# Altium PCB FuncGen.PcbDoc
Units mil, origin at the board's own origin, x right, y up, seen from the top; angles counter-clockwise.
Board outline 2500 x 1300 mil, 4 copper layers (Top Layer, Signal Layer 1, Signal Layer 2, Bottom Layer), stack 30.634 mil thick; 77 components, 50 nets, 267 pads, 75 vias.
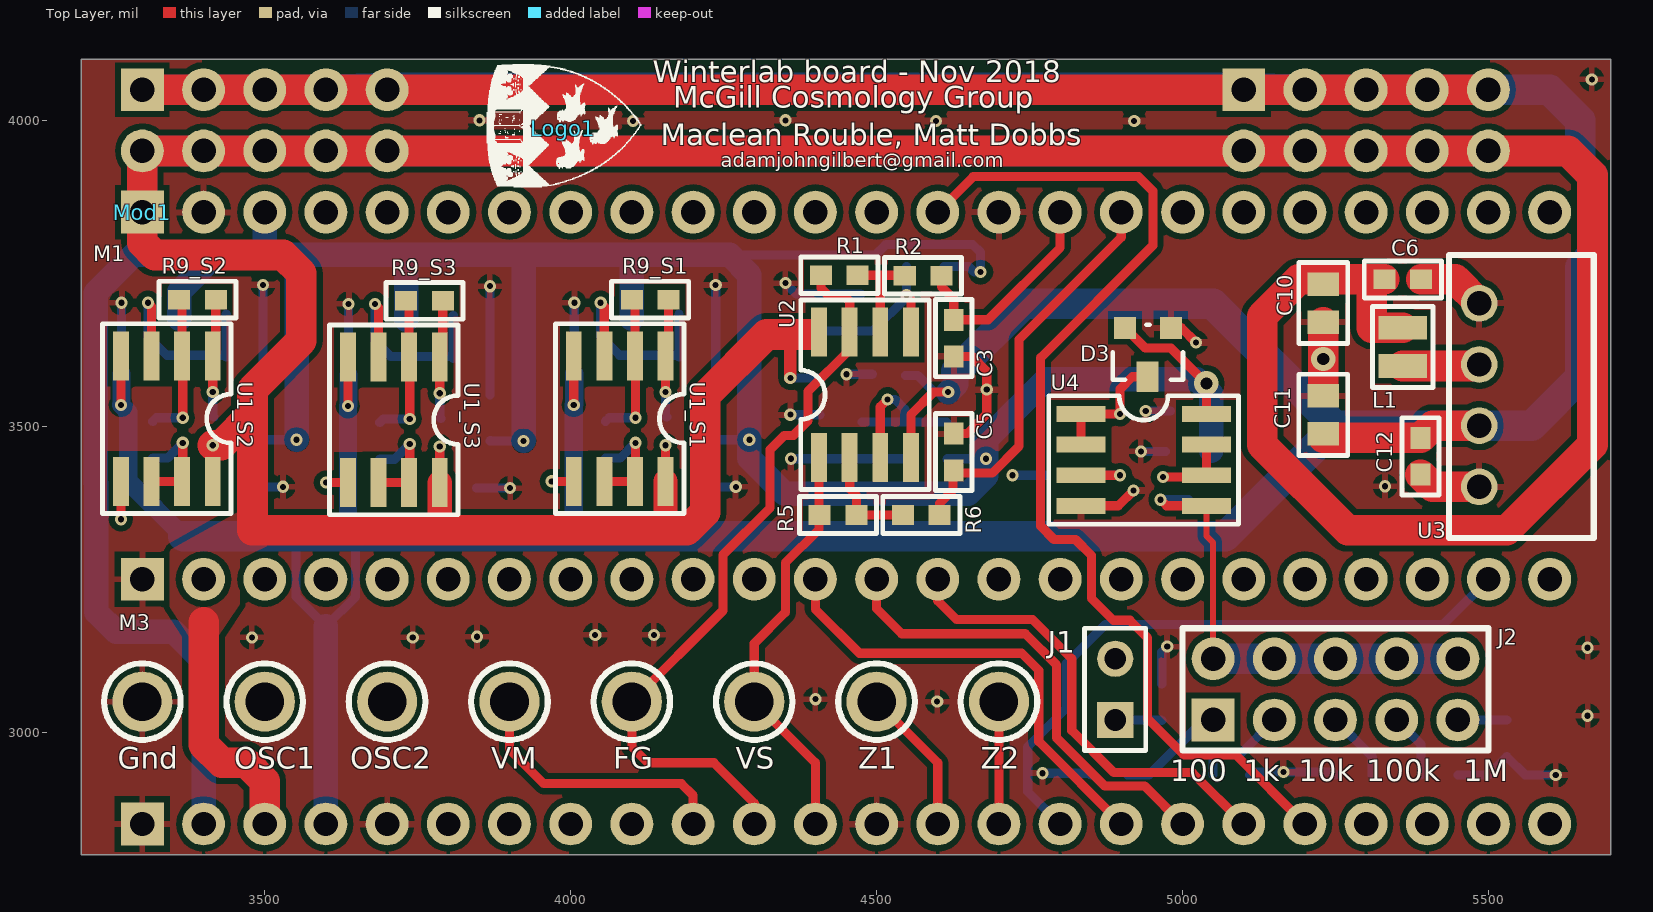
[diagram p0: Top Layer view]
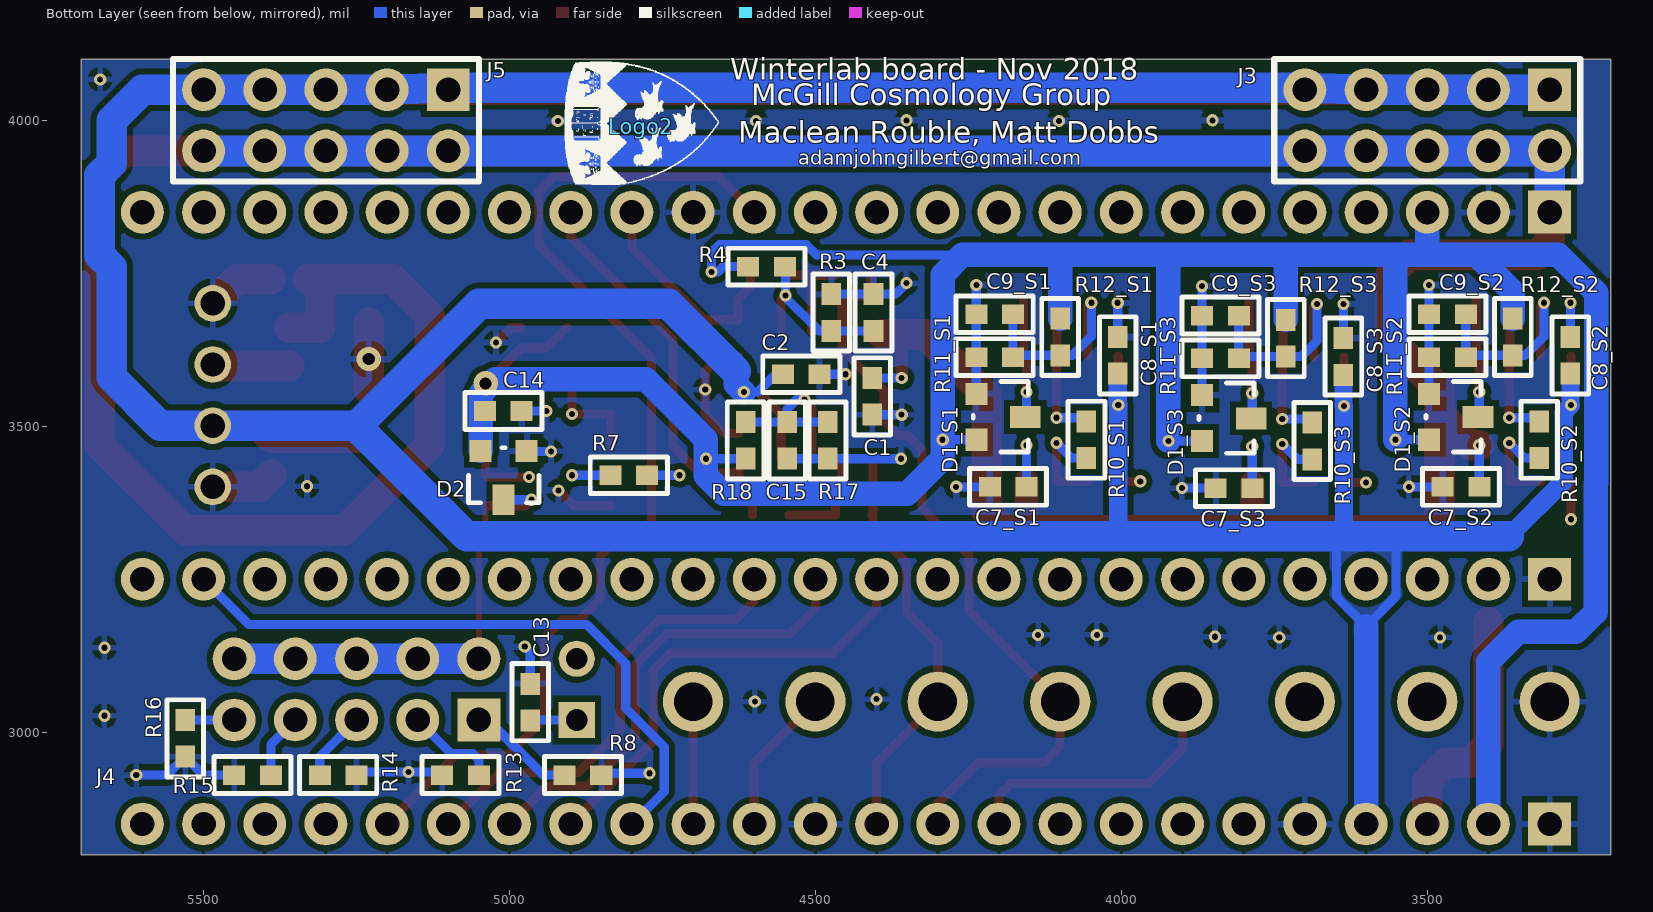
[diagram p1: Bottom Layer view, seen from below]
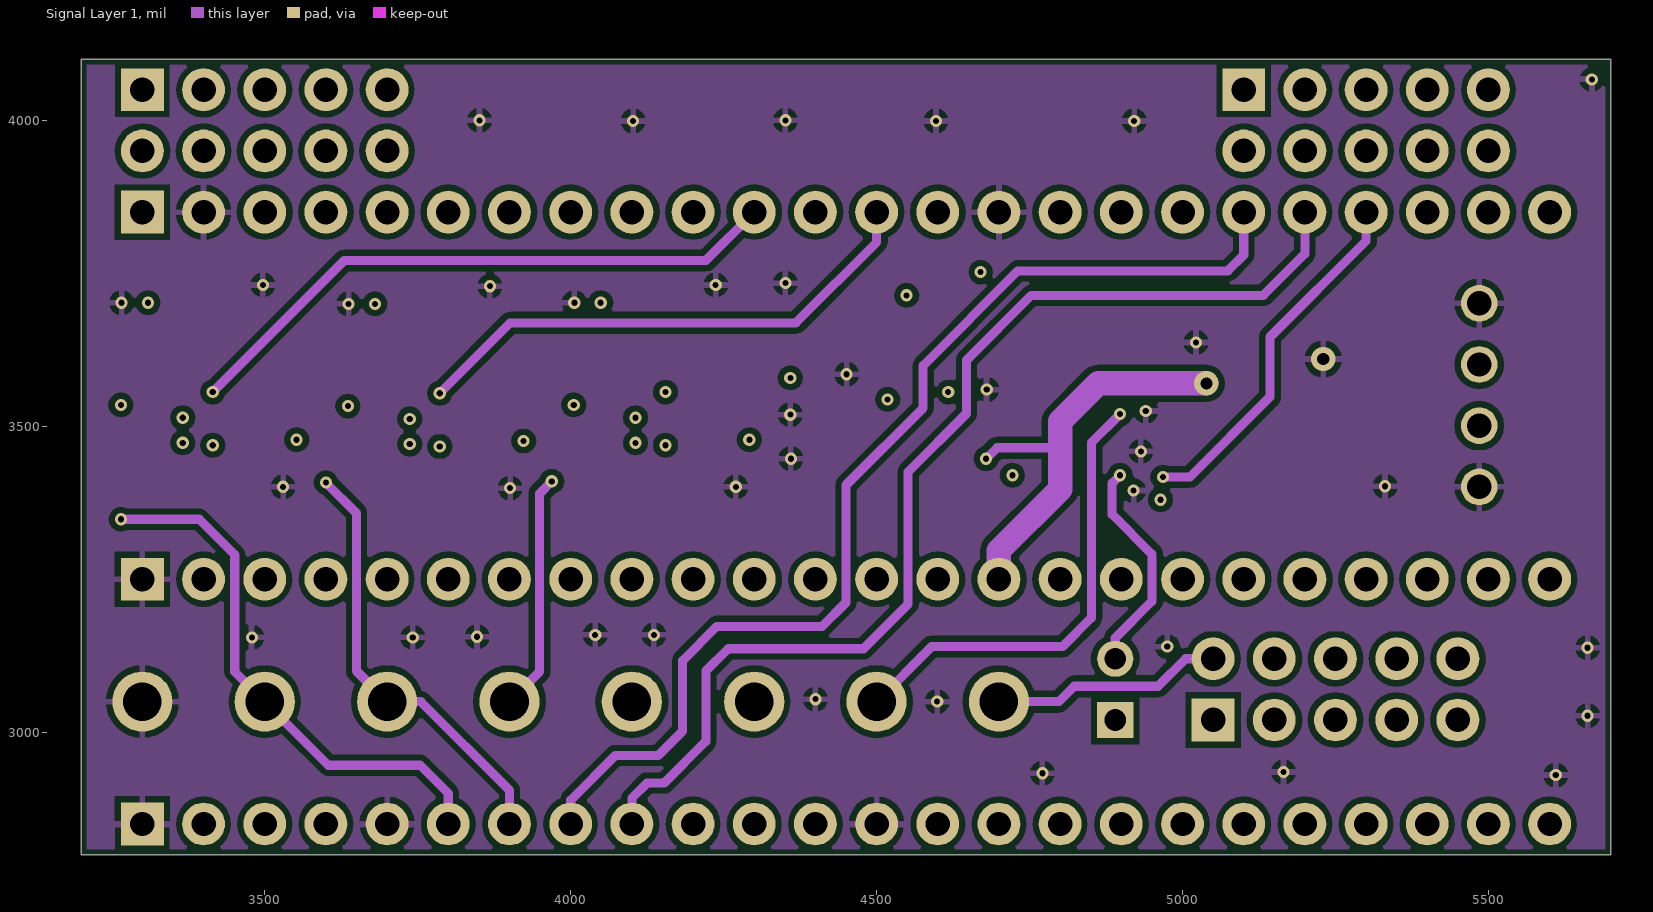
[diagram p2: Signal Layer 1]
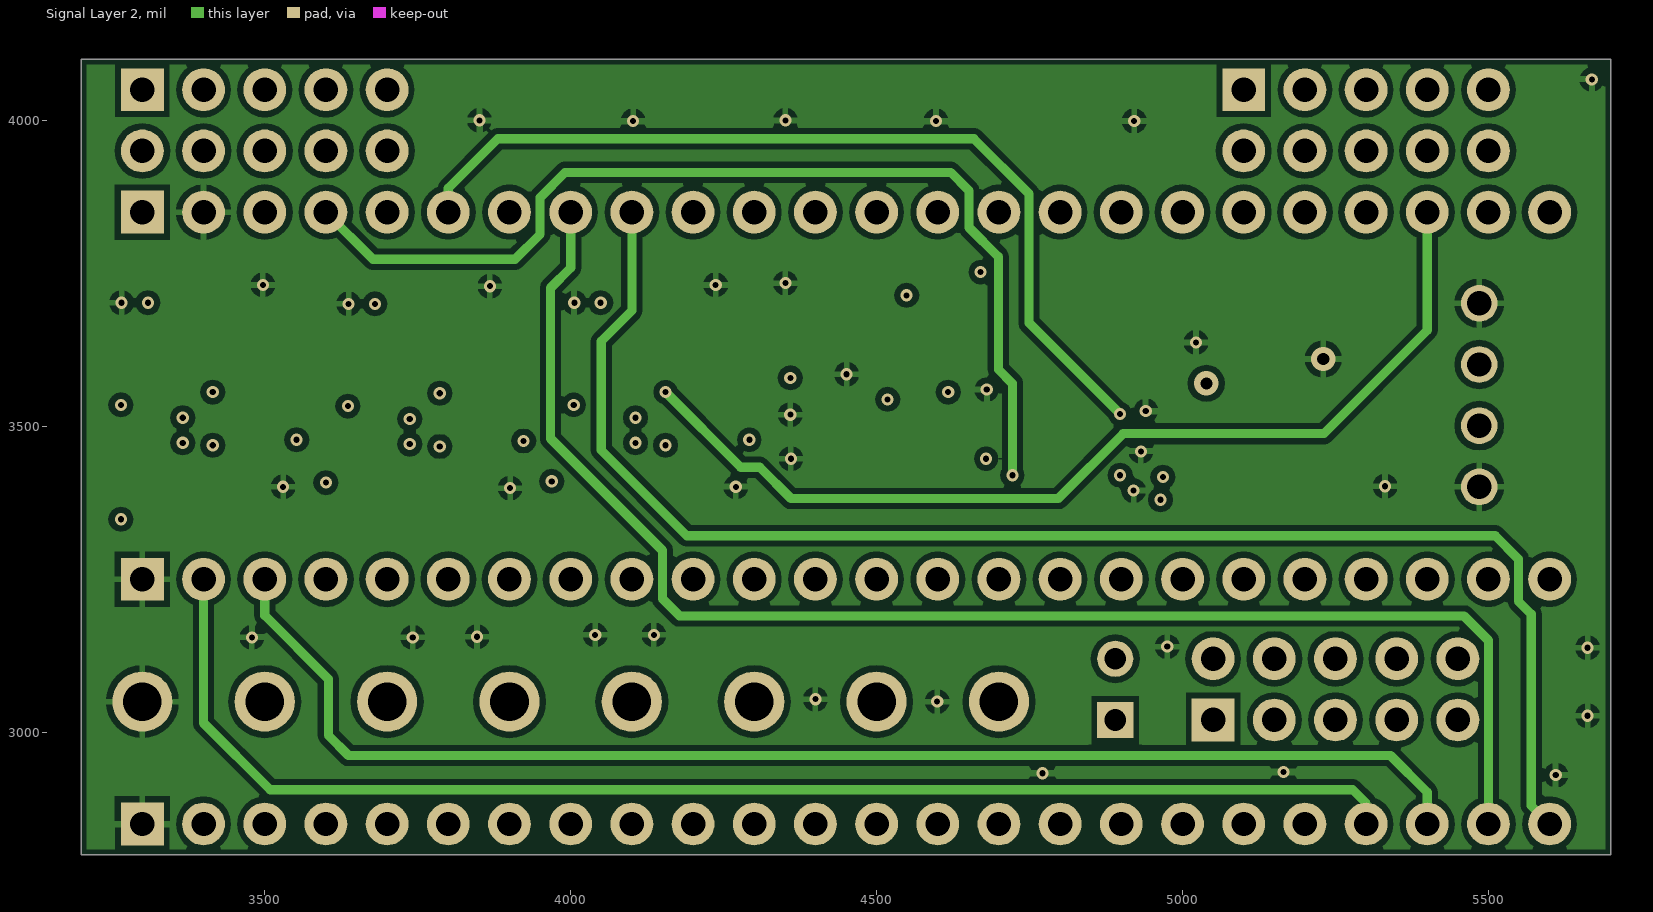
[diagram p3: Signal Layer 2]

## Layer stack, top to bottom
Top Solder: solder mask 0.4, Solder Resist, Dk 3.5
Top Layer: signal copper 1.4
Dielectric 1: core 10, FR-4, Dk 4.2
Signal Layer 1: signal copper 1.417
Dielectric 3: prepreg 5, Dk 4.2
Signal Layer 2: signal copper 1.417
Dielectric 2: core 10, Dk 4.2
Bottom Layer: signal copper 1.4
Bottom Solder: solder mask 0.4, Solder Resist, Dk 3.5

## Board outline
3200,2800 3200,4100 5700,4100 5700,2800

## Design rules (kind name [scope] priority, off if disabled: settings)
Clearance [All] p1: gap=6 ignorepadtopadclearanceinfootprint=FALSE except(0: Arc-Hole Track-Hole SMDPad-Hole THPad-Hole Via-Hole Fill-Hole Poly-Hole Region-Hole Text-Hole; 10: Arc-Fill Arc-Poly Arc-Region Track-Fill Track-Poly Track-Region SMDPad-Fill SMDPad-Poly SMDPad-Region THPad-Fill THPad-Poly THPad-Region Via-Fill Via-Poly Via-Region Fill-Fill Fill-Poly Fill-Region Poly-Poly Poly-Region Region-Region)
MinimumSolderMaskSliver [All] p1: minsoldermaskwidth=5
PolygonConnect [All] p1: connectstyle=Relief reliefconductorwidth=10 reliefentries=4 polygonreliefangle="90 Angle" airgapwidth=10
RoomDefinition S4 [InComponentClass('S4')] p1: confinementstyle=ConfineIn formatcopy=TRUE lockcomponents=FALSE outline 4360,3311 4670,3311 4670,3805 4360,3805
RoomDefinition S3 [InComponentClass('S3')] p2: confinementstyle=ConfineIn formatcopy=TRUE lockcomponents=FALSE outline 3949,3749 3592,3749 3592,3341 3949,3341
RoomDefinition S2 [InComponentClass('S2')] p3: confinementstyle=ConfineIn formatcopy=TRUE lockcomponents=FALSE outline 3578,3751 3221,3751 3221,3343 3578,3343
RoomDefinition S1 [InComponentClass('S1')] p4: confinementstyle=ConfineIn formatcopy=TRUE lockcomponents=FALSE outline 4318,3751 3961,3751 3961,3343 4318,3343
RoomDefinition ME1 [InComponentClass('ME1')] p5: confinementstyle=ConfineIn formatcopy=TRUE lockcomponents=FALSE outline 4728,2886 5574,2886 5574,3693 4728,3693
RoutingVias [All] p1: holewidth=10 width=20 viastyle="Through Hole" minholewidth=10 minwidth=20 maxholewidth=100 maxwidth=100
SilkToSilkClearance [All] p1: silktosilkclearance=0
SilkToSolderMaskClearance [IsPad] p1: minsilkscreentomaskgap=5 clearancetoexposedcopper=TRUE
SolderMaskExpansion [All] p1: expansion=4
Width [All] p1: maxlimit=200 minlimit=7 preferedwidth=15
27 further rules are at their usual default settings.

## Classes and differential pairs
component class TopLevel: C6 C10 C11 C12 FG Gnd J3 J4 J5 L1 Logo1 Logo2 M1 M3 Mod1 OSC1 OSC2 U3 VM VS Z1 Z2
component class ME1: C13 C14 D2 D3 J1 J2 R7 R8 R13 R14 R15 R16 U4
component class S1: C7_S1 C8_S1 C9_S1 D1_S1 R9_S1 R10_S1 R11_S1 R12_S1 U1_S1
component class S2: C7_S2 C8_S2 C9_S2 D1_S2 R9_S2 R10_S2 R11_S2 R12_S2 U1_S2
component class S3: C7_S3 C8_S3 C9_S3 D1_S3 R9_S3 R10_S3 R11_S3 R12_S3 U1_S3
component class S4: C1 C2 C3 C4 C5 C15 R1 R2 R3 R4 R5 R6 R17 R18 U2
channel class LevelShiftADC: S1 S2 S3

## Components (designator, comment, footprint, x,y, rotation, side; value= is the part's Value field where it differs from the comment)
C1 "0.1uF" 0603 4407,3519 r90 bottom
C2 "0.1uF" 0603 4553,3585 r180 bottom
C3 "47pF" 0603 4626,3614 r90 top
C4 "0.1uF" 0603 4405,3716 r270 bottom
C5 "47pF" 0603 4626,3488 r270 top
C6 "330pF" 0603 5330,3740 r0 top
C7_S1 "0.1uF" 0603 4215,3401 r180 bottom (schematic designator C7)
C7_S2 "0.1uF" 0603 3475,3401 r180 bottom (schematic designator C7)
C7_S3 "0.1uF" 0603 3846,3399 r180 bottom (schematic designator C7)
C8_S1 "0.1uF" 0603 4006,3586 r90 bottom (schematic designator C8)
C8_S2 "0.1uF" 0603 3266,3586 r90 bottom (schematic designator C8)
C8_S3 "0.1uF" 0603 3637,3584 r90 bottom (schematic designator C8)
C9_S1 "0.1uF" 0603 4237,3683 r180 bottom (schematic designator C9)
C9_S2 "0.1uF" 0603 3497,3683 r180 bottom (schematic designator C9)
C9_S3 "0.1uF" 0603 3868,3681 r180 bottom (schematic designator C9)
C10 "10uF" 0805 5230,3670 r90 top
C11 "10uF" 0805 5230,3487.5 r90 top
C12 "330pF" 0603 5389,3421 r90 top
C13 "0.1uF" 0603 4966,3079 r270 bottom
C14 "0.1uF" 0603 4980,3525 r0 bottom
C15 "0.1uF" 0603 4546,3447 r90 bottom
D1_S1 "SDM40E20LS-7-F" SOT23 4157,3515 r270 bottom (schematic designator D1)
D1_S2 "SDM40E20LS-7-F" SOT23 3417,3515 r270 bottom (schematic designator D1)
D1_S3 "SDM40E20LS-7-F" SOT23 3788,3513 r270 bottom (schematic designator D1)
D2 "SDM40E20LS-7-F" SOT23 5010,3380 r0 bottom
D3 "SDM40E20LS-7-F" SOT23 4943,3581 r180 top
FG "Test Point" TESTPOINT 4100,3050 r0 top
Gnd "Long Green Test Point" TESTPOINT 3300,3050 r0 top
J1 "Header 2pin 0.1\"" HDR1X2 4890,3020 r90 top
J2 "Header 2 x 5pin 0.1\"" Header2x5 5050,3020 r0 top
J3 "Header 2 x 5pin 0.1\"" Header2x5 3300,4050 r0 bottom
J4 "24 Pin Header" HEADER24MALE 3300,2850 r0 bottom
J5 "Header 2 x 5pin 0.1\"" Header2x5 5100,4050 r0 bottom
L1 "22uH" 0806 5360,3661 r270 top
Logo1 "McGillLogo" McGillLogo1 3988,3986 r90 top
Logo2 "McGillLogo" McGillLogo1 4785,3990 r90 bottom
M1 "Teensy 3.6 SideB" HEADER24FEMALE 3300,3850 r0 top
M3 "Teensy 3.6 SideA" HEADER24FEMALE 3300,3250 r0 top locked
Mod1 "Teensy 3.6 3D model" TEENSY3DMODEL 3300,3850 r270 top locked
OSC1 "Test Point" TESTPOINT 3500,3050 r0 top
OSC2 "Test Point" TESTPOINT 3700,3050 r180 top
R1 "Res0603" 0603 4469,3747 r180 top value=10k
R2 "Res0603" 0603 4606,3746 r180 top value=3.32k
R3 "Res0603" 0603 4474,3716 r270 bottom value=4k
R4 "Res0603" 0603 4550,3761 r0 bottom value=6.65k
R5 "Res0603" 0603 4467,3355 r180 top value=10k
R6 "Res0603" 0603 4603,3355 r180 top value=3.32k
R7 "Res0603" 0603 4835,3420 r180 bottom value=1k
R8 "Res0603" 0603 4850,2930 r0 bottom value=100
R9_S1 "Res0603" 0603 4100,3707 r0 top value=3.32k (schematic designator R9)
R9_S2 "Res0603" 0603 3360,3707 r0 top value=3.32k (schematic designator R9)
R9_S3 "Res0603" 0603 3731,3705 r0 top value=3.32k (schematic designator R9)
R10_S1 "Res0603" 0603 4057,3448 r90 bottom value=10k (schematic designator R10)
R10_S2 "Res0603" 0603 3317,3448 r90 bottom value=10k (schematic designator R10)
R10_S3 "Res0603" 0603 3688,3446 r90 bottom value=10k (schematic designator R10)
R11_S1 "Res0603" 0603 4237,3613 r180 bottom value=4k (schematic designator R11)
R11_S2 "Res0603" 0603 3497,3613 r180 bottom value=4k (schematic designator R11)
R11_S3 "Res0603" 0603 3868,3611 r180 bottom value=4k (schematic designator R11)
R12_S1 "Res0603" 0603 4100,3616 r90 bottom value=6.7k (schematic designator R12)
R12_S2 "Res0603" 0603 3360,3616 r90 bottom value=6.7k (schematic designator R12)
R12_S3 "Res0603" 0603 3731,3614 r90 bottom value=6.7k (schematic designator R12)
R13 "Res0603" 0603 5110,2930 r180 bottom value=1k
R14 "Res0603" 0603 5250,2930 r0 bottom value=10k
R15 "Res0603" 0603 5450,2930 r180 bottom value=100k
R16 "Res0603" 0603 5530,2960 r90 bottom value=1M
R17 "Res0603" 0603 4480,3447 r90 bottom value=4k
R18 "Res0603" 0603 4614,3507 r270 bottom value=6.65k
U1_S1 "LT6231CS8#PBF" SO8 4155,3615 r270 top (schematic designator U1)
U1_S2 "LT6231CS8#PBF" SO8 3415,3615 r270 top (schematic designator U1)
U1_S3 "LT6231CS8#PBF" SO8 3786,3613 r270 top (schematic designator U1)
U2 "LT6231CS8#PBF" SO8 4406,3449 r90 top
U3 "RFM-0505S" RFM-0505S 5485,3701 r270 top
U4 "LT1801CS8" SO8 4834,3520 r0 top
VM "Test Point" TESTPOINT 3900,3050 r0 top
VS "Test Point" TESTPOINT 4300,3050 r0 top
Z1 "Test Point" TESTPOINT 4500,3050 r0 top
Z2 "Test Point" TESTPOINT 4700,3050 r0 top

## Footprints (in the part's own frame and the unit in brackets; to place one, negate y for a bottom-side part, rotate by r counter-clockwise, add the part's x,y. Pads: shape width x height; smd on the part's side, far side on the other; paste and mask are expansions set on the pad)
0603 [mil]
  rect 36x32 smd: 1(0,0) 2(60,0)
  silkscreen extent -33,-30 93,30
0805 [mil]
  rect 38.5x52 smd: 1(0,0) 2(62.5,0)
  silkscreen extent -35,-40 98,40
0806 [mil]
  rect 38.5x78.74 smd: 1(0,0) 2(62.5,0)
  silkscreen extent -35,-49 98,49
HDR1X2 [mm] "Connector; Header; 2 Position"
  rect 1.5x1.5 hole 0.9: 1(0,0)
  round 1.5 hole 0.9: 2(2.54,0)
  silkscreen extent -1.27,-1.27 3.81,1.27
Header2x5 [mil]
  rect 70x70 hole 40: 1(0,0)
  round 70 hole 40: 2(0,100) 3(100,0) 4(100,100) 5(200,0) 6(200,100) 7(300,0) 8(300,100) 9(400,0) 10(400,100)
  silkscreen extent -50,-50 450,150, body extent -46,-54 454,146, height 336
HEADER24FEMALE [mil] "Header24Female"
  rect 70x70 hole 40: 1(0,0)
  round 70 hole 40: 2(100,0) 3(200,0) 4(300,0) 5(400,0) 6(500,0) 7(600,0) 8(700,0) 9(800,0) 10(900,0) 11(1000,0) 12(1100,0) 13(1200,0) 14(1300,0) 15(1400,0) 16(1500,0) 17(1600,0) 18(1700,0) 19(1800,0) 20(1900,0) 21(2000,0) 22(2100,0) 23(2200,0) 24(2300,0)
  body extent -60,-50 2360,50, height 335
HEADER24MALE [mil] "Header24Male"
  rect 70x70 hole 40: 1(0,0)
  round 70 hole 40: 2(100,0) 3(200,0) 4(300,0) 5(400,0) 6(500,0) 7(600,0) 8(700,0) 9(800,0) 10(900,0) 11(1000,0) 12(1100,0) 13(1200,0) 14(1300,0) 15(1400,0) 16(1500,0) 17(1600,0) 18(1700,0) 19(1800,0) 20(1900,0) 21(2000,0) 22(2100,0) 23(2200,0) 24(2300,0)
  body extent -50,-50 2350,50, height 336
McGillLogo1 [mil] "McGillLogo"
  silkscreen extent -95,-127 106,124
RFM-0505S [mil]
  round 60 hole 40: 1(0,0) 2(100,0) 3(200,0) 4(300,0)
  silkscreen extent -79,-49 384,187, body extent -78,-49 383,186, height 394
SO8 [mil]
  rect 80x26 smd: 1(0,0) 2(0,-50) 3(0,-100) 4(0,-150) 5(205,-150) 6(205,-100) 7(205,-50) 8(205,0)
  silkscreen extent -53,-180 258,30
SOT23 [mil]
  rect 36x36 smd: 1(-38,-80) 2(37,-80)
  rect 36x50 smd: 3(0,0)
  silkscreen extent -58,-85 57,5
TEENSY3DMODEL [mil]
  body extent -52,-105 648,2350, height 616
TESTPOINT [mm] "Test Point with Loop - 1.6mm hole"
  round 2.5 hole 1.6: 0(0,0)
  silkscreen extent -1.59,-1.59 1.59,1.59, body extent -1.6,-1.59 1.57,1.58, height 8.13

## Part data
C1 C2 C3 C4 C5 C6 C7_S1 C7_S2 C7_S3 C8_S1 C8_S2 C8_S3 C9_S1 C9_S2 C9_S3 C12 C13 C14 C15: library part Cap0603, "Capacitor, Ceramic, 0603"
C10 C11: library part Cap0805, "0805", Manufacturer="Samsung Electro-Mechanics", Manufacturers Part Number=CL21A106KPFNNNG, Supplier Part Number 1=1276-6456-1-ND, Supplier 1=Digi-Key, SupplierUnitCost=$0.068
D1_S1 D1_S2 D1_S3 D2 D3: library part DiodeClamp
FG: library part TestPoint, Manufacturer="Keystone Electronics", Manufacturers Part Number="Red - 5005", Supplier Part Number 1=36-5005-ND, Assembly Comments=none, Loaded=True, Param=Red, Part constraints=5005, Supplier 1=Digi-Key, SupplierUnitCost=$0.15
Gnd: library part TestPoint, "Test Point", Manufacturer="Keystone Electronics", Manufacturers Part Number="Green - 5126", Supplier Part Number 1=36-5126-ND, Assembly Comments=none, Loaded=True, Param=Green, Part constraints=5126, Supplier 1=Digi-Key, SupplierUnitCost=$0.15
J1: library part Header2, "Header, 0.1\", 2-Pin straight (Any equivalent - may need to be value added)", Manufacturer=Digikey
J2 J3 J5: library part Header2x5, "Header, 0.1\", 2 row 5 pins", Manufacturer=Digikey
J4: Manufacturer="Wurth Electronics Inc.", Manufacturers Part Number=61302411121, Supplier Part Number 1=732-5331-ND, Loaded=True, Part constraints=61302411121, Supplier 1=Digi-Key, SupplierUnitCost=$0.92
L1: library part CBC2016T220M, "0805", Supplier Part Number 1=587-1609-1-ND, Manufacturers Part Number=CBC2016T220M, Supplier 1=Digikey, SupplierUnitCost=$0.23
Logo1 Logo2: library part Logo
M1: "Teensy 3.6 SideA"
OSC1 OSC2: library part TestPoint, Manufacturer="Keystone Electronics", Manufacturers Part Number="Purple - 5124", Supplier Part Number 1=36-5124-ND, Assembly Comments=none, Loaded=True, Param=Purple, Part constraints=5124, Supplier 1=Digi-Key, SupplierUnitCost=$0.15
R1 R2 R3 R4 R5 R6 R7 R8 R9_S1 R9_S2 R9_S3 R10_S1 R10_S2 R10_S3 R11_S1 R11_S2 R11_S3 R12_S1 R12_S2 R12_S3 R13 R14 R15 R16 R17 R18: "Resistor"
U1_S1 U1_S2 U1_S3 U2: library part TSH82IYDT, "Dual R-R Opamp Soic 8 215Mhz GBP", Manufacturer="Linear Technology/Analog Devices", Supplier Part Number 1=LT6231CS8#PBF-ND, Assembly Comments=none, Loaded=True, Manufacturers Part Number=LT6231CS8#PBF, Part constraints=LT6231CS8#PBF, Supplier 1=Digi-Key, SupplierUnitCost=$3.46
U3: "5V->5V DC-DC converter", Manufacturer="Recom Power", Supplier Part Number 1=945-3159-ND, Loaded=True, Manufacturers Part Number=RFM-0505S, Supplier 1=Digi-Key, SupplierUnitCost=$1.24
U4: library part TSH82IYDT, "Dual R-R Opamp Soic 8 70Mhz GBP", Manufacturer="Linear Technology/Analog Devices", Assembly Comments=none, Loaded=True, Manufacturers Part Number=LT1801CS8, Part constraints=LT1801CS8, Supplier 1=Digi-Key, Supplier Part Number 1=LT1801CS8, SupplierUnitCost=$3.27
VM: library part TestPoint, Manufacturer="Keystone Electronics", Manufacturers Part Number="Yellow - 5009", Supplier Part Number 1=36-5009-ND, Assembly Comments=none, Loaded=True, Param=Yellow, Part constraints=5009, Supplier 1=Digi-Key, SupplierUnitCost=$0.15
VS: library part TestPoint, Manufacturer="Keystone Electronics", Manufacturers Part Number="Orange - 5008", Supplier Part Number 1=36-5008-ND, Assembly Comments=none, Loaded=True, Param=Orange, Part constraints=5008, Supplier 1=Digi-Key, SupplierUnitCost=$0.15
Z1 Z2: library part TestPoint, Manufacturer="Keystone Electronics", Manufacturers Part Number="Blue - 5122", Supplier Part Number 1=36-5122-ND, Assembly Comments=none, Loaded=True, Param=Blue, Part constraints=5122, Supplier 1=Digi-Key, SupplierUnitCost=$0.15
Mod1: Loaded=True

## Via types
v1: diameter 20, hole 10, Top Layer to Bottom Layer, 73 vias
v2: diameter 40, hole 20, Top Layer to Bottom Layer, 2 vias

## Nets (pads, with @x,y where several pads share a name; then routed paths per layer and width w, separated by ;. In a path a pad name is that pad's centre, name@x,y a point inside that pad or via, vN(x,y) a via of type N, cw(c..) or ccw(c..) an arc to the next point about the centre after c; other vN are vias at no path point)
1.23V_S1: C9_S1.2 R11_S1.2 R12_S1.1 U1_S1.3 | length 356.6
  Top Layer w15: v1(4049,3702) 4055,3696 U1_S1.3
  Bottom Layer w15: v1(4049,3702) 4049,3647 4080,3616 R12_S1.1 4174,3616 R11_S1.2 C9_S1.2
1.23V_S2: C9_S2.2 R11_S2.2 R12_S2.1 U1_S2.3 | length 356.6
  Top Layer w15: v1(3309,3702) 3315,3696 U1_S2.3
  Bottom Layer w15: v1(3309,3702) 3309,3647 3340,3616 R12_S2.1 3434,3616 R11_S2.2 C9_S2.2
1.23V_S3: C9_S3.2 R11_S3.2 R12_S3.1 U1_S3.3 | length 359.5
  Top Layer w15: v1(3680,3700) 3686,3694 U1_S3.3
  Bottom Layer w15: v1(3680,3700) 3680,3640 3706,3614 R12_S3.1 3805,3614 R11_S3.2 C9_S3.2
3V3: C14.2 D1_S1.2 D1_S2.2 D1_S3.2 D2.2 D3.2 J4.2 M1.3 M3.15 R4.2 R12_S1.2 R12_S2.2 R12_S3.2 R18.2 U4.8 | length 6083.5
  Top Layer w15: D3.2 4939,3628 4981,3628 v2(5039,3570) U4.8
  Signal Layer 1 w15: v1(4679,3447) 4697,3465 4800,3465
  Signal Layer 1 w40: M3.15 4700,3297 4800,3397 4800,3465 4800,3508 4862,3570 v2(5039,3570)
  Bottom Layer w15: D1_S2.2@3498,3479 D1_S2.2 v1(3552,3478) ; D1_S3.2@3869,3477 D1_S3.2 v1(3923,3476) ; D1_S1.2@4238,3479 D1_S1.2 v1(4292,3478) ; 4260,3780 4498,3780 4515,3797 4657,3797 4670,3784 v1(4670,3752) 4660,3752 4651,3761 R4.2 ; R18.2@4615,3446 4616,3447 v1(4679,3447)
  Bottom Layer w40: R12_S2.2 3360,3720 3420,3780 ; J4.2 3400,3115 3351,3164 3257,3164 3225,3196 3225,3407 3224,3408 3224,3718 3286,3780 3420,3780 ; 3500,3783 M1.3 ; v1(3552,3478) 3552,3772 3560,3780 ; R12_S3.2 3731,3779 3730,3780 ; v1(3923,3476) 3923,3777 3920,3780 ; R12_S1.2 4100,3770 4090,3780 ; D2.2 5047,3553 5023,3577 4777,3577 4679,3479 v1(4679,3447) 4679,3419 4650,3390 4350,3390 4292,3448 v1(4292,3478) 4292,3748 4260,3780 4090,3780 ; 3420,3780 3560,3780 ; 3560,3780 3730,3780 ; 3730,3780 3920,3780 ; 3920,3780 4090,3780
5V: C1.2 C6.1 C7_S1.2 C7_S2.2 C7_S3.2 C10.2 J3.2 J3.4 J3.6 J3.8 J3.10 J4.3 J5.2 J5.4 J5.6 J5.8 J5.10 L1.1 M1.1 U1_S1.8 U1_S2.8 U1_S3.8 U2.8 | length 9480.2
  Top Layer w15: U1_S2.8 v1(3415,3469) ; U1_S3.8 v1(3786,3467) ; U1_S1.8 v1(4155,3469)
  Top Layer w20: v1(4359,3579) 4359,3649 4360,3650
  Top Layer w40: 3786,3353 U1_S3.8 ; 4155,3355 U1_S1.8
  Top Layer w50: 3400,3180 3400,2980 3430,2950 3470,2950 3500,2920 J4.3 ; v1(3415,3469) 3429,3469 3480,3520 ; 4390,3650 4360,3650 4320,3650 4220,3550 4220,3360 4190,3330 3480,3330 3480,3520 ; C6.1 5300,3740 ; L1.1 5309,3661 5309,3731 5300,3740 ; 3480,3520 3480,3560 3560,3640 3560,3750 3530,3780 3320,3780 3300,3800 M1.1 J3.2 J3.4 J3.6 J3.8 J3.10 J5.2 J5.4 J5.6 J5.8 J5.10 5630,3950 5670,3910 5670,3470 5530,3330 5270,3330 5130,3470 5130,3680 5190,3740 5300,3740
  Bottom Layer w15: C7_S2.2 v1(3415,3469) ; C7_S3.2 v1(3786,3467) ; C7_S1.2 v1(4155,3469) ; v1(4359,3579) C1.2
  Bottom Layer w50: M1.1 J3.2 J3.4 J3.6 J3.8 J3.10 J5.2 J5.4 J5.6 J5.8 J5.10
CS0: J4.17 M3.12 | length 762.3
  Top Layer w15: M3.12 4400,3201 4472,3129 4737,3129 4765,3101 4765,2985 J4.17
CS1: J4.16 M3.23 | length 1057.2
  Bottom Layer w15: J4.16 4747,2903 4747,2976 4810,3039 4810,3112 4874,3176 5426,3176 M3.23
DA0: C5.2 M1.17 R6.1 | length 661.1
  Top Layer w15: R6.1 4603,3374 4625,3396 4625,3427 C5.2 4630.5,3423.5 4688.73,3423.5 4733,3467.77 4733,3642 4900,3809 M1.17
DA1: C3.2 M1.16 R2.1 | length 361.2
  Top Layer w15: R2.1 4606,3728 4626,3708 C3.2 4682,3674 4800,3792 M1.16
FG: FG.0 J4.11 R1.2 U2.7 | length 1233.5
  Top Layer w15: J4.11 4300,2884 4234,2950 4126,2950 4100,2976 FG.0 4249,3199 4249,3290 4326,3367 4326,3462 4349,3485 4364,3485 4388,3509 4388,3557 4456,3625 U2.7 4456,3704 4447,3713 4422,3713 4409,3726 R1.2
GND: C1.1 C2.2 C3.1 C4.1 C5.1 C6.2 C7_S1.1 C7_S2.1 C7_S3.1 C8_S1.2 C8_S2.2 C8_S3.2 C9_S1.1 C9_S2.1 C9_S3.1 C10.1 C11.2 C12.1 C13.1 C14.1 C15.1 D1_S1.1 D1_S2.1 D1_S3.1 D2.1 D3.1 Gnd.0 J4.1 J4.5 J4.13 M1.2 M1.15 M3.1 R3.1 R8.1 R11_S1.1 R11_S2.1 R11_S3.1 R13.1 R14.1 R15.1 R16.1 R17.1 U3.1 U3.4 U4.4 | length 2501.4
  Top Layer w15: C5.1 4648,3488 4680,3520 v1(4680,3560) 4680,3590 4656,3614 C3.1 ; U4.4 4895,3370 v1(4920,3395) ; D3.1 4998,3661 v1(5022,3637)
  Top Layer w50: C11.2@5230,3560 v2(5230,3610) C10.1 ; C12.1 5409,3401 U3.4 ; C6.2 5446,3740 U3.1
  Bottom Layer w15: C8_S2.2 v1(3266,3702) ; C7_S2.1 v1(3530,3401) ; D1_S2.1 R11_S2.1 C9_S2.1 v1(3497,3731) ; C8_S3.2 v1(3637,3700) ; C7_S3.1 v1(3901,3399) ; D1_S3.1 R11_S3.1 C9_S3.1 v1(3868,3729) ; C8_S1.2 v1(4006,3702) ; C7_S1.1 v1(4270,3401) ; D1_S1.1 R11_S1.1 C9_S1.1 v1(4237,3731) ; v1(4351,3734) 4369,3716 C4.1 R3.1 ; v1(4359,3519) C1.1 ; v1(4360,3447) R17.1 C15.1 ; v1(4451,3585) C2.2 ; v1(4771,2933) 4847,2933 R8.1 ; v1(4932,3459) D2.1@4972,3459 ; v1(4940,3525) C14.1 ; C13.1 4966,3131 v1(4975,3140) ; R13.1 5115,2935 v1(5165,2935) 5245,2935 R14.1 ; R15.1 5500,2930 R16.1 5560,2930 v1(5610,2930)
  other v1: 5662,3027 4599,3050 4400,3054 5662,3138 3479,3155 3742,3155 3847,3156 4040,3159 4136,3159 5331,3402 4102,3999 4597,3999 4921,3999 3851,4000 4351,4000 5669,4067
Imp1adc: D3.3 J4.14 M1.6 U4.1 U4.2 Z1.0 | length 2690.5
  Top Layer w15: Z1.0 4600,2950 J4.14 ; U4.2 U4.1 v1(4898,3520) 4898,3561 4918,3581 D3.3
  Signal Layer 1 w15: Z1.0 4590,3140 4804,3140 4851,3187 4851,3473 v1(4898,3520)
  Signal Layer 2 w15: M1.6 3800,3889 3881,3970 4659,3970 4749,3880 4749,3669 v1(4898,3520)
Imp2adc: M1.21 U4.6 U4.7 | length 718.5
  Top Layer w15: v1(4968,3417) 5036,3417 U4.6 U4.7
  Signal Layer 1 w15: v1(4968,3417) 5012,3417 5143,3548 5143,3646 5300,3803 M1.21
ImpDig: M1.4 R7.2 | length 1736.7
  Signal Layer 2 w15: M1.4 3677,3773 3909,3773 3950,3814 3950,3874 3991,3915 4621,3915 4651,3885 4651,3825 4699,3777 4699,3593 4722,3570 v1(4722,3420)
  Bottom Layer w15: v1(4722,3420) R7.2
MISO0: J4.19 M3.14 | length 754.7
  Top Layer w15: M3.14 4600,3215 4631,3184 4755,3184 4819,3120 4819,3003 4888,2934 5016,2934 J4.19
MOSI0: J4.18 M3.13 | length 763.5
  Top Layer w15: M3.13 4500,3202 4541,3161 4743,3161 4794,3110 4794,2991 4873,2912 4938,2912 J4.18
N5V: C2.1 C8_S1.1 C8_S2.1 C8_S3.1 C11.1 C12.2 J3.1 J3.3 J3.5 J3.7 J3.9 J4.4 J5.1 J5.3 J5.5 J5.7 J5.9 U1_S1.4 U1_S2.4 U1_S3.4 U2.4 U3.3 | length 10420.4
  Top Layer w15: v1(3265,3535) U1_S2.4 ; v1(3636,3533) U1_S3.4 ; v1(4005,3535) U1_S1.4 ; U2.4 4556,3519 4593,3556 v1(4617,3556)
  Top Layer w50: J3.1 J3.3 J3.5 J3.7 J3.9 J5.1 J5.3 J5.5 J5.7 J5.9 ; C11.1@5230,3481 C12.2 5409,3501 U3.3
  Bottom Layer w15: v1(3265,3535) v1@3266,3536 ; 3551,3320 3551,3222 3600,3173 3648.5,3221.5 3648.5,3311.5 3640,3320 3636,3324 ; v1(3636,3533) v1@3637,3534 ; v1(4005,3535) v1@4006,3536 ; C2.1@4547,3583 4567,3583 4594,3556 v1(4617,3556)
  Bottom Layer w30: v1(3265,3535) 3277,3523 3277,3410.16 3367.16,3320 ; v1@3266,3536 C8_S2.1 ; 3636,3324 v1(3636,3533) ; v1@3637,3534 C8_S3.1 ; 4005,3325 v1(4005,3535) ; v1@4006,3536 C8_S1.1
  Bottom Layer w40: J4.4 3600,3173 ; v1(4617,3556) 4630,3569 4630,3590
  Bottom Layer w50: J3.1 J3.3 J3.5 J3.7 3699,4053 5099,4053 5100.09,4052.97 J5.3 J5.5 J5.7 J5.9 5600,4050 5650,4000 5650,3930 5670,3910 5670,3780 5650,3760 5650,3580 5571,3501 U3.3 5249,3501 ; 3367.16,3320 3551,3320 3640,3320 4010,3320 ; 4005,3325 4010,3320 ; 4630,3590 4740,3700 5050,3700 5249,3501 ; 4010,3320 5070,3320 5249,3499 5249,3501
NetC13_2: C13.2 J1.1 | length 76.4
  Bottom Layer w15: J1.1 4965,3020 C13.2
NetJ1_2: J1.2 R7.1 U4.3 | length 484.2
  Top Layer w15: U4.3 v1(4898,3420)
  Signal Layer 1 w15: J1.2 4890,3154 4950,3214 4950,3291 4885,3356 4885,3407 v1(4898,3420)
  Bottom Layer w15: R7.1 v1(4898,3420)
NetJ2_1: J2.1 R8.2 | length 177.3
  Bottom Layer w15: R8.2 4945,2930 5035,3020 J2.1
NetJ2_3: J2.3 R13.2 | length 171.9
  Bottom Layer w15: R13.2 5050,2955 5060,2965 5095,2965 J2.3 J2.3@5150,3000
NetJ2_5: J2.5 R14.2 | length 114.9
  Bottom Layer w15: J2.5 5310,2960 R14.2
NetJ2_7: J2.7 R15.2 | length 106.6
  Bottom Layer w15: J2.7 5390,2980 R15.2
NetJ2_9: J2.9 R16.2 | length 80
  Bottom Layer w15: J2.9 R16.2
NetL1_2: L1.2 U3.2 | length 126
  Top Layer w50: L1.2 5482.5,3598.5 U3.2
NetR1_1: R1.1 R2.2 U2.6 | length 170.8
  Top Layer w15: R1.1 4507,3747 ; U2.6 4506,3746 4507,3747 ; R2.2 4545,3747 4507,3747
NetR5_1: R5.1 R6.2 U2.2 | length 174.6
  Top Layer w15: U2.2 4456,3398 4467,3387 R5.1 R6.2
NetR9_S1_1: R9_S1.1 R10_S1.2 U1_S1.2 | length 247
  Top Layer w15: R9_S1.1 4105,3702 U1_S1.2 4106,3614 v1(4106,3514)
  Bottom Layer w15: R10_S1.2 4063,3514 v1(4106,3514)
NetR9_S2_1: R9_S2.1 R10_S2.2 U1_S2.2 | length 247
  Top Layer w15: R9_S2.1 3365,3702 U1_S2.2 3366,3614 v1(3366,3514)
  Bottom Layer w15: R10_S2.2 3323,3514 v1(3366,3514)
NetR9_S3_1: R9_S3.1 R10_S3.2 U1_S3.2 | length 247
  Top Layer w15: R9_S3.1 3736,3700 U1_S3.2 3737,3612 v1(3737,3512)
  Bottom Layer w15: R10_S3.2 3694,3512 v1(3737,3512)
NetR10_S1_1: R10_S1.1 U1_S1.6 U1_S1.7 | length 172.8
  Top Layer w15: U1_S1.6 U1_S1.7 4106,3411 v1(4106,3473)
  Bottom Layer w15: R10_S1.1 4081,3448 v1(4106,3473)
NetR10_S2_1: R10_S2.1 U1_S2.6 U1_S2.7 | length 172.8
  Top Layer w15: U1_S2.6 U1_S2.7 3366,3411 v1(3366,3473)
  Bottom Layer w15: R10_S2.1 3341,3448 v1(3366,3473)
NetR10_S3_1: R10_S3.1 U1_S3.6 U1_S3.7 | length 172.8
  Top Layer w15: U1_S3.6 U1_S3.7 3737,3409 v1(3737,3471)
  Bottom Layer w15: R10_S3.1 3712,3446 v1(3737,3471)
OSC1: J4.6 OSC1.0 U1_S2.5 | length 944.5
  Top Layer w15: v1(3265,3348) U1_S2.5
  Signal Layer 1 w15: v1(3265,3348) 3393,3348 3451,3290 3451,3099 OSC1.0 3604,2946 3754,2946 3800,2900 J4.6
OSC1adc: D1_S2.3 M1.11 R9_S2.2 U1_S2.1 | length 1201.7
  Top Layer w15: v1(3415,3556) U1_S2.1 3420,3620 R9_S2.2
  Signal Layer 1 w15: v1(3415,3556) 3630,3771 4221,3771 M1.11
  Bottom Layer w15: v1(3415,3556) 3415,3517 D1_S2.3
OSC2: J4.7 OSC2.0 U1_S3.5 | length 750.5
  Top Layer w15: v1(3600,3408) U1_S3.5
  Signal Layer 1 w15: v1(3600,3408) 3650,3358 3650,3100 OSC2.0 3755,3050 3900,2905 J4.7
OSC2adc: D1_S3.3 M1.13 R9_S3.2 U1_S3.1 | length 1060.2
  Top Layer w15: v1(3786,3554) U1_S3.1 3791,3618 R9_S3.2
  Signal Layer 1 w15: v1(3786,3554) 3901,3669 4368,3669 4500,3801 M1.13
  Bottom Layer w15: v1(3786,3554) 3786,3515 D1_S3.3
RX1: J4.21 M3.2 | length 2223.3
  Signal Layer 2 w15: M3.2 3400,3015 3509,2906 5278,2906 5300,2884 J4.21
SCK0: J4.20 M1.14 | length 1760.8
  Top Layer w15: M1.14 4658,3908 4928,3908 4951.5,3884.5 4951.5,3795.5 4768,3612 4768,3337 4790,3315 4825,3315 4851,3289 4851,3219 4887,3183 4914,3183 4943,3154 4943,3022 5002,2963 5087,2963 J4.20
SCL0: J4.23 M1.8 | length 2399.6
  Signal Layer 2 w15: M1.8 4000,3759 3967,3726 3967,3480 4150,3297 4150,3218 4178,3190 5460,3190 5500,3150 J4.23
SCL1: J4.9 M1.20 | length 1823.5
  Signal Layer 1 w15: J4.9 4100,2892 4125,2917 4153,2917 4221,2985 4221,3100 4257.5,3136.5 4478.5,3136.5 4551.5,3209.5 4551.5,3425.5 4647,3521 4647,3608 4753,3714 5132,3714 5200,3782 M1.20
SDA0: J4.24 M1.9 | length 2436.6
  Signal Layer 2 w15: M1.9 4100,3689 4050,3639 4050,3461 4190,3321 5511,3321 5549,3283 5549,3214 5570,3193 5570,2880 J4.24
SDA1: J4.8 M1.19 | length 1798.3
  Signal Layer 1 w15: J4.8 4000,2889 4073,2962 4143,2962 4183,3002 4183,3117 4239,3173 4411,3173 4450,3212 4450,3404 4576,3530 4576,3599 4731,3754 5074,3754 5100,3780 M1.19
TX1: J4.22 M3.3 | length 2184.6
  Signal Layer 2 w15: M3.3 3500,3191 3604,3087 3604,2995 3637,2962 5340,2962 5400,2902 J4.22
VM: J4.10 U1_S1.5 VM.0 | length 880.6
  Top Layer w15: VM.0 3900,2972 3956,2916 4181,2916 4200,2897 J4.10 ; v1(3969,3410) U1_S1.5
  Signal Layer 1 w15: VM.0 3949,3099 3949,3390 v1(3969,3410)
VMadc: D1_S1.3 M1.22 R9_S1.2 U1_S1.1 | length 1818.9
  Top Layer w15: v1(4155,3556) U1_S1.1 4160,3620 R9_S1.2
  Signal Layer 2 w15: v1(4155,3556) 4278,3433 4309,3433 4360,3382 4797,3382 4903,3488 5231,3488 5400,3657 M1.22
  Bottom Layer w15: v1(4155,3556) 4155,3517 D1_S1.3
VrefA: C4.2 R3.2 R4.1 U2.5 | length 279.7
  Top Layer w15: v1(4549,3714) 4556,3707 U2.5
  Bottom Layer w15: C4.2 R3.2 4494,3656 4549,3711 v1(4549,3714) R4.1@4549,3761
VrefB: C15.2 R17.2 R18.1 U2.3 | length 296.4
  Top Layer w15: U2.3 4506,3532 v1(4518,3544)
  Bottom Layer w15: R17.2@4476,3507 R17.2 C15.2 ; v1(4518,3544) 4530,3544 4546,3528 C15.2 ; R18.1@4616,3505 R18.1 C15.2
VS: J4.12 R5.2 U2.1 VS.0 | length 685.7
  Top Layer w15: J4.12 4400,2950 VS.0 4300,3145 4351,3196 4351,3277 4406,3332 R5.2@4406,3356 ; U2.1 R5.2@4406,3356 ; R5.2 R5.2@4406,3356
ZTest2: D2.3 J2.2 J2.4 J2.6 J2.8 J2.10 J4.15 U4.5 Z2.0 | length 1387
  Top Layer w10: U4.5 5039,3321 5050,3310 J2.2
  Top Layer w15: J4.15 Z2.0 Z2.0@4720,3070 ; v1(4964,3380) 4974,3370 U4.5
  Signal Layer 1 w15: Z2.0 4798,3050 4823,3075 4960,3075 5005,3120 J2.2
  Bottom Layer w15: v1(4964,3380) D2.3
  Bottom Layer w50: J2.2 J2.4 J2.6 J2.8 J2.10
pads on no net: M1.5 M1.7 M1.10 M1.12 M1.18 M1.23 M1.24 M3.4 M3.5 M3.6 M3.7 M3.8 M3.9 M3.10 M3.11 M3.16 M3.17 M3.18 M3.19 M3.20 M3.21 M3.22 M3.24

## Polygon pours and split planes (outlines as drawn)
N5V on Bottom Layer "5VTop" (solid, pour order 4): 3541,3316 3541,3197 3578,3160 3627,3160 3659,3192 3659,3316
GND on Bottom Layer "Bottom Layer-No Net" (solid, remove dead copper, pour order 0): 3200,4100 3200,2800 5700,2800 5700,4100
GND on Top Layer "Bottom Layer-No Net" (solid, remove dead copper, pour order 14): 3200,4100 3200,2800 5700,2800 5700,4100
5V on Top Layer "5VTop" (solid, pour order 2): 3380,3151 3342,3209 3342,3296 3454,3359 3507,3306 3459.13,3283 3459.13,3209 3420,3151
GND on Signal Layer 2 "5VTop" (solid, pour order 12): 3209,4091 3209,2809 5691,2809 5691,4091
GND on Signal Layer 1 "5VTop" (solid, pour order 8): 3209,4091 3209,2809 5691,2809 5691,4091

## Silkscreen, mask and mechanical layers (free items; w line width, h text height)
Top Overlay:
  text "Winterlab board - Nov 2018" at 4134,4051 h60
  text "McGill Cosmology Group" at 4168,4009 h60
  text "Maclean Rouble, Matt Dobbs" at 4147,3948 h60
  text "adamjohngilbert@gmail.com" at 4245,3915 h40
  text "100" at 4980,2920 h35
  text "1k" at 5100,2920 h35
  text "10k" at 5190,2920 h35
  text "100k" at 5300,2920 h35
  text "1M" at 5460,2920 h35
Bottom Overlay:
  text "Winterlab board - Nov 2018" at 4639,4055 h60
  text "McGill Cosmology Group" at 4605,4013 h60
  text "Maclean Rouble, Matt Dobbs" at 4626,3952 h60
  text "adamjohngilbert@gmail.com" at 4528,3919 h40
Top Solder:
  region: 3425,3460 3405,3460 3405,3453 3425,3453
  rectangle: 3405,3565 3425,3572
  rectangle: 3255,3357 3275,3368
  region: 4165,3460 4145,3460 4145,3453 4165,3453
  rectangle: 4145,3565 4164,3572
  rectangle: 3779,3450 3793,3457
  rectangle: 3777,3564 3795,3570
  rectangle: 4542,3697 4555,3702
Bottom Solder:
  region: 4952,3449 4952,3469 4941,3469 4941,3449
  region: 4959,3515 4959,3535 4949,3535 4949,3515
  region: 5024,3557 5024,3537 5054,3537 5054,3557
  lines w10: 4518,3541 4518,3538 ; 4518,3544 4518,3538 ; 4531,3525 4518,3538
Mechanical 1:
  the board outline again, w10